# Altium PCB TutorialBoard.PcbDoc
Units mil, origin at the board's own origin, x right, y up, seen from the top; angles counter-clockwise.
Board outline 1717.45 x 1771.6 mil, 2 copper layers (Top Layer, Bottom Layer); 17 components, 13 nets, 50 pads, 4 vias.
Unrouted connection lines stored in the file: 2.
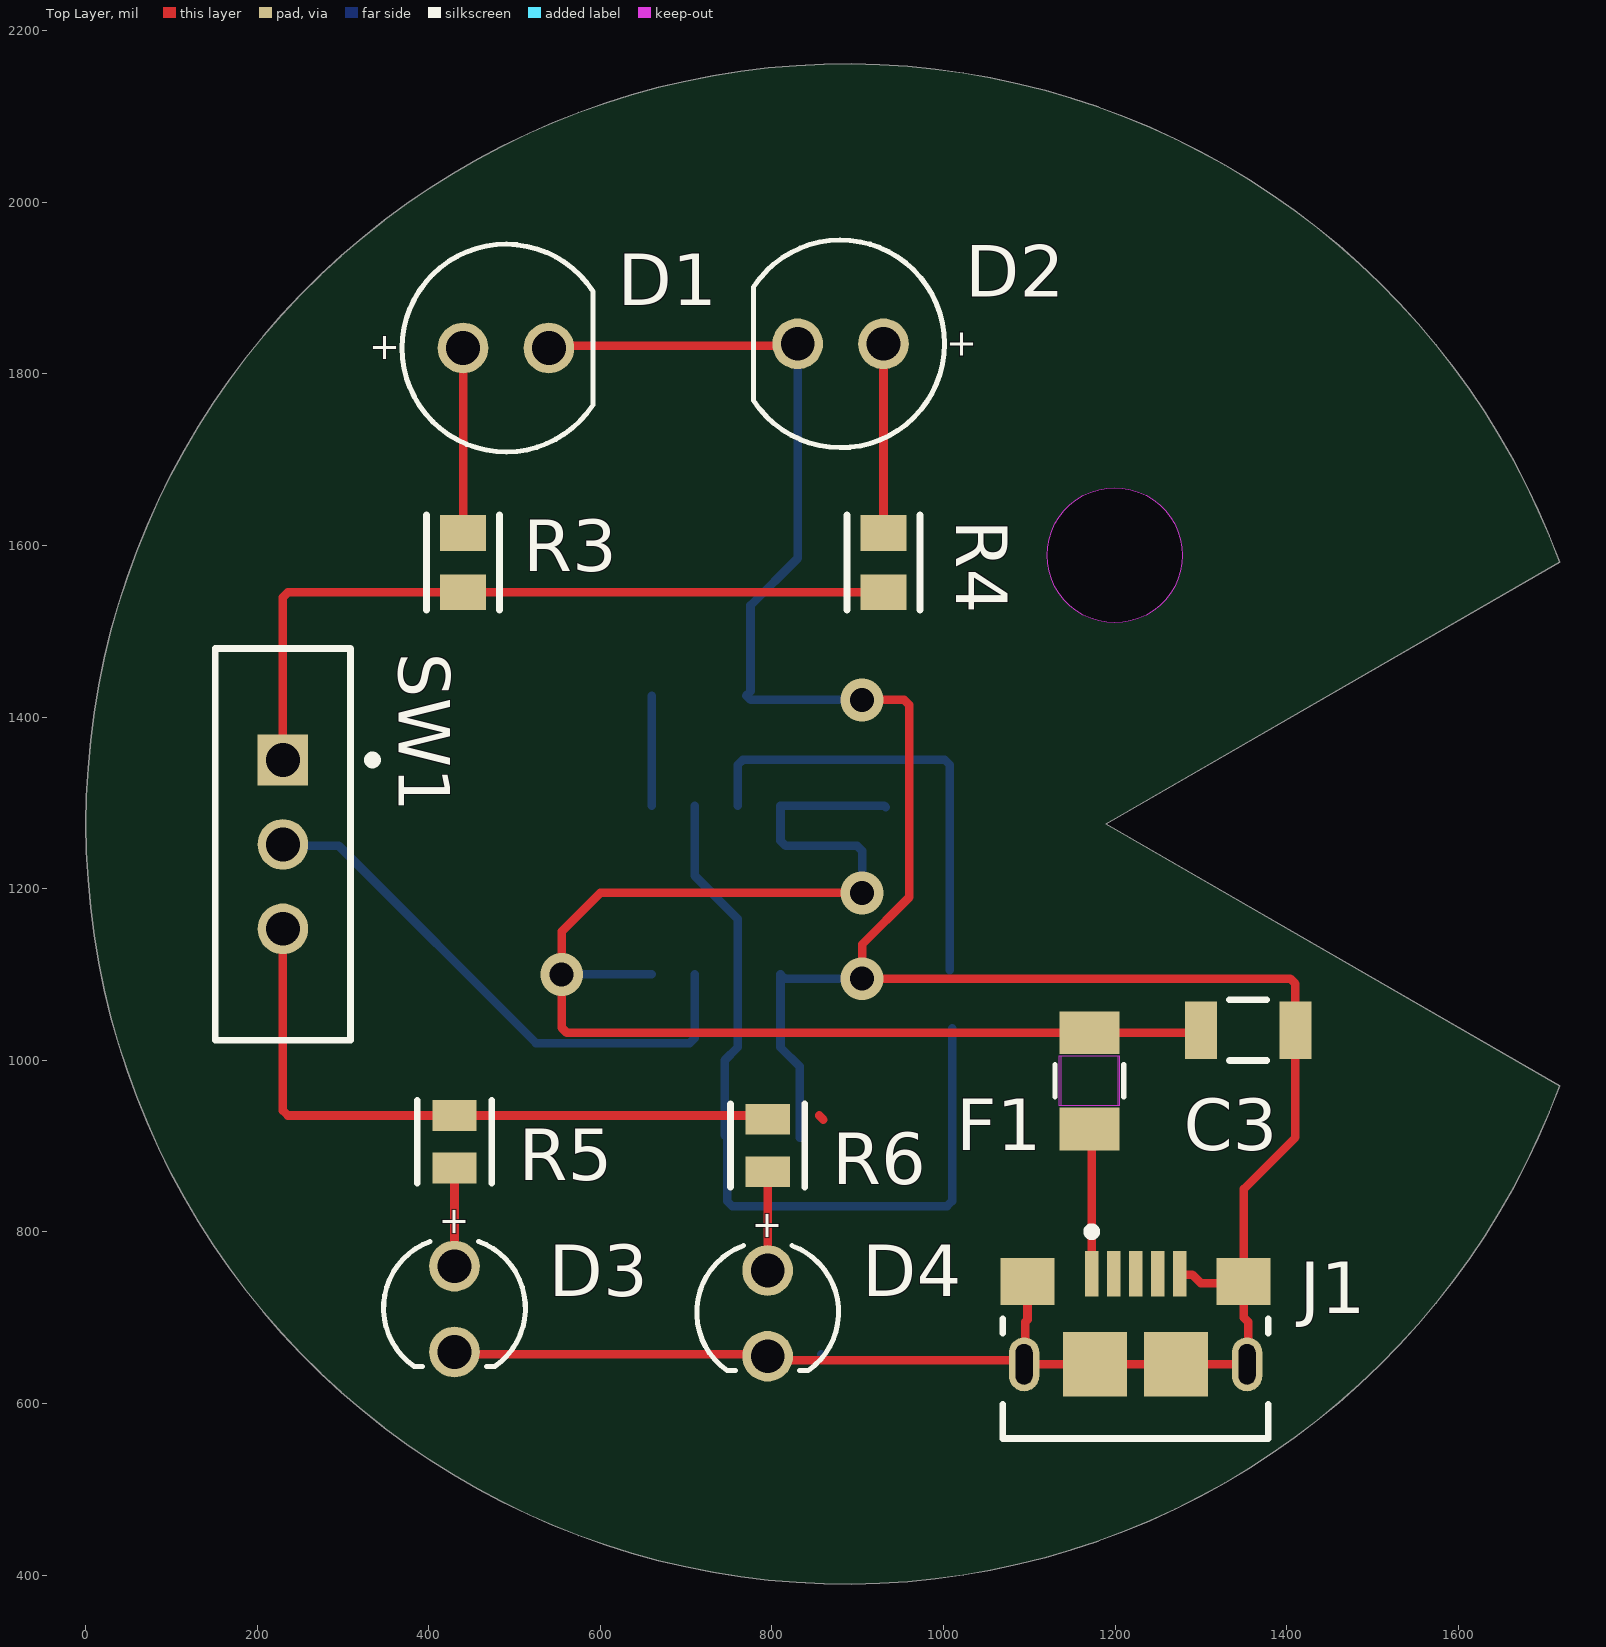
[diagram p0: Top Layer view]
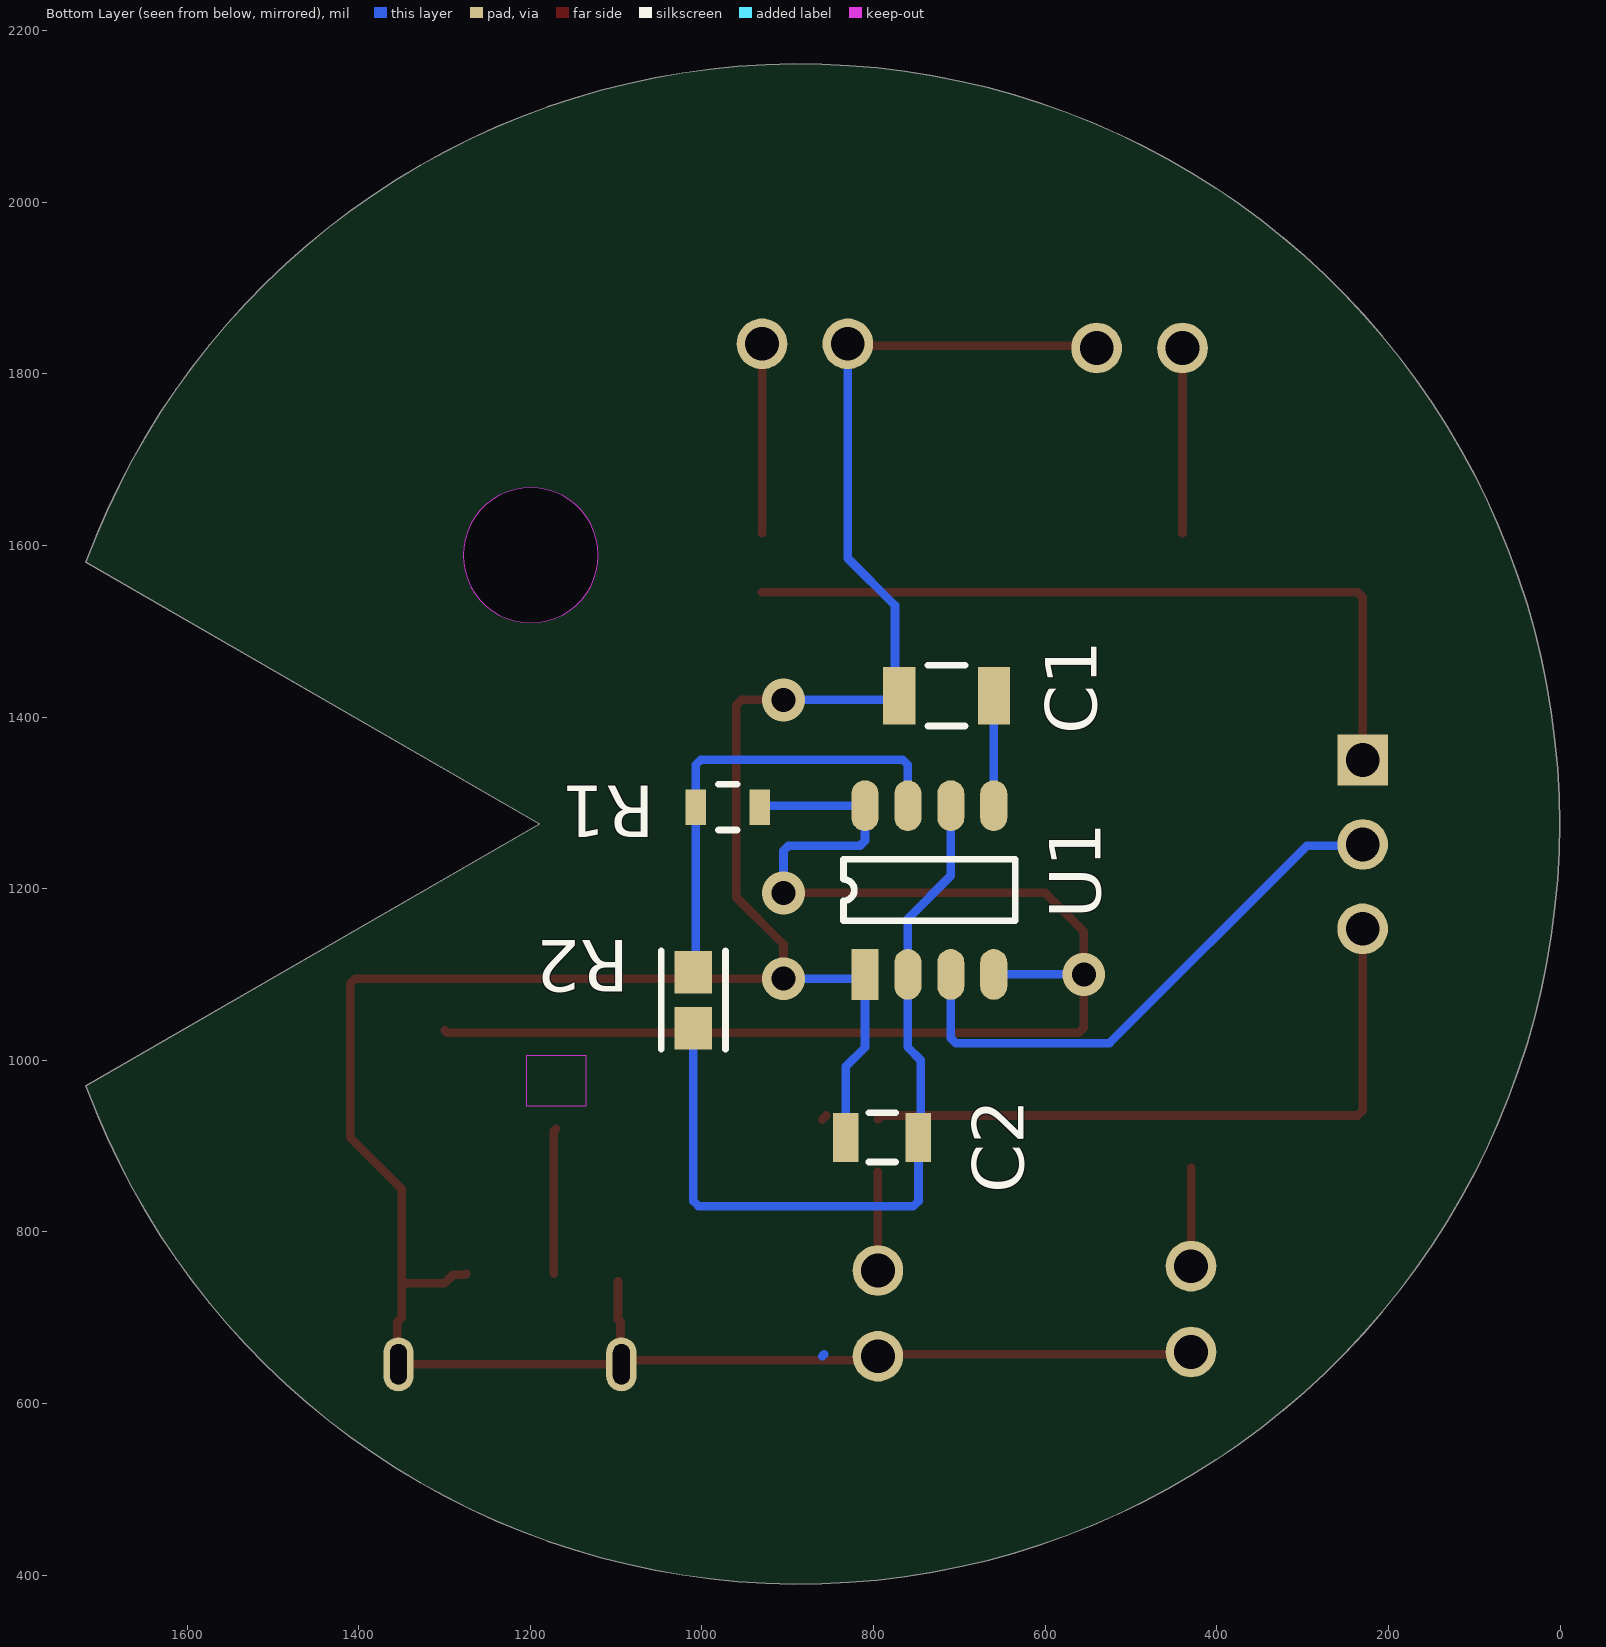
[diagram p1: Bottom Layer view, seen from below]

## Layer stack, top to bottom
Top Solder: solder mask 0.4, Solder Resist, Dk 3.5
Top Layer: signal copper 1.4
Dielectric 1: dielectric 12.6, FR-4, Dk 4.8
Bottom Layer: signal copper 1.4
Bottom Solder: solder mask 0.4, Solder Resist, Dk 3.5

## Board outline
1717.95,970.21 cw(c886.33,1275.33) 1717.95,1580.45 1189.47,1275.33
cut-out: 1199.51,1509.78 cw(c1199.51,1588.52) 1120.77,1588.52 cw(c1199.51,1588.52) 1199.51,1667.26 cw(c1199.51,1588.52) 1278.25,1588.52 cw(c1199.51,1588.52)

## Design rules (kind name [scope] priority, off if disabled: settings)
Clearance [All] p1: gap=10 ignorepadtopadclearanceinfootprint=FALSE
PolygonConnect [All] p1: connectstyle=Relief reliefconductorwidth=10 reliefentries=4 polygonreliefangle="90 Angle" airgapwidth=10
RoutingVias [All] p1: holewidth=28 width=50 viastyle="Through Hole" minholewidth=28 minwidth=50 maxholewidth=28 maxwidth=50
SolderMaskExpansion [All] p1: expansion=0 istentingtop=FALSE
SupplyNets "Schematic Supply Nets_1" [InNet('+5')] p1: voltage=0.000
SupplyNets "Schematic Supply Nets" [InNet('GND')] p2: voltage=0.000
Width [All] p1: maxlimit=10 minlimit=10 preferedwidth=10
30 further rules are at their usual default settings.

## Classes and differential pairs
component class Power: C3 J1
component class 555_timer: C1 C2 D1 D2 D3 D4 R1 R2 R3 R4 R5 R6 SW1 U1

## Components (designator, comment, footprint, x,y, rotation, side; value= is the part's Value field where it differs from the comment)
C1 "C1206C103K5RAC7210" FP-C1206C-EB-MFG 715,1425 r0 bottom value="10,000 pF"
C2 "CGA4J3X7S1A685K125AB" FP-CGA4J-IPC_B 790,910 r0 bottom
C3 "C1206C103K5RAC7210" FP-C1206C-EB-MFG 1355,1035 r0 top value="10,000 pF"
D1 "151051BS04000" WL-TMRC_D5.9H8.7 490,1830 r0 top
D2 "151051BS04000" WL-TMRC_D5.9H8.7 880,1835 r180 top
D3 "151031VS06000" WL-TMRC_D3.95H5.3 50430,-49290 r270 top
D4 "151031VS06000" WL-TMRC_D3.95H5.3 50795,-49295 r270 top
F1 "C1F 250" C1_BEL 1170,976 r90 top
J1 "10118193-0001LF" FCI-10118193-0001LF-5_V 1223.82,698.8 r0 top
R1 "RK73H2ATTE1001F" FP-RK73H2A-MFG 970,1295 r180 bottom
R2 "RR0816P-104-D" FP-RR0816-IPC_A 1010,1070 r90 bottom
R3 "CR0805-JW-101ELF" FP-CR0805-IPC_B 440,1580 r90 top
R4 "CR0805-JW-101ELF" FP-CR0805-IPC_B 930,1580 r90 top
R5 "CRGCQ0805F120R" FP-CRGCQ0805-IPC_C 430,905 r270 top value=120Ω
R6 "CRGCQ0805F120R" FP-CRGCQ0805-IPC_C 795,900.55 r270 top value=120Ω
SW1 "EG1218" ESWI-EG1218_V 230,1251.57 r270 top
U1 "NE555S-13" NE555S-13 810,1100 r90 bottom

## Footprints (in the part's own frame and the unit in brackets; to place one, negate y for a bottom-side part, rotate by r counter-clockwise, add the part's x,y. Pads: shape width x height; smd on the part's side, far side on the other; paste and mask are expansions set on the pad)
C1_BEL [mil]
  rect 50x70 smd paste+0 mask+0: 1(-56,0) 2(56,0)
  Top Layer keep-out region: -29,-33 -29,33 29,33 29,-33
  Keep-Out Layer region: -29,-35 -29,35 29,35 29,-35
  silkscreen extent -19,-40 19,40, body extent -67,-35 67,35, height 31
ESWI-EG1218_V [mm] "THD, 3-Leads, Body 11.6x4mm, Pitch 2.5mm"
  rect 1.5x1.5 hole 1: 1(-2.5,0)
  round 1.5 hole 1: 2(0,0) 3(2.5,0)
  silkscreen extent -5.8,-2 5.8,2.78, body extent -5.8,-2 5.8,2, height 7.4
FCI-10118193-0001LF-5_V [mm] "Micro, USB-B, 5-Leads, Body 7.86x5.05mm, Pitch 0.65 mm"
  rect 0.4x1.35 smd: 1(-1.3,1.325) 2(-0.65,1.325) 3(0,1.325) 4(0.65,1.325) 5(1.3,1.325)
  rect 1.6x1.4 smd: 6(-3.2,1.1) 7(3.2,1.1)
  rect 1.9x1.9 smd: 8(-1.2,-1.35) 9(1.2,-1.35)
  oval 0.9x1.6 hole 0.5 slot 1.2 at 90 deg: 10(-3.3,-1.35) 11(3.3,-1.35)
  silkscreen extent -3.93,-3.55 3.93,2.7, body extent -3.93,-4.16 3.93,1.5, height 2.83
FP-C1206C-EB-MFG [mm]
  rect 0.95x1.7 smd paste+0 mask+0: 1(-1.4,0) 2(1.4,0)
  silkscreen extent -0.55,-0.9 0.55,0.9, body extent -1.6,-0.8 1.6,0.8, height 0.88
FP-CGA4J-IPC_B [mm]
  rect 0.756x1.456 smd paste+0 mask+0: 1(-1.075,0) 2(1.075,0)
  silkscreen extent -0.4,-0.73 0.4,0.73, body extent -1,-0.63 1,0.63, height 1.45
FP-CR0805-IPC_B [mil]
  rect 41.66x53.63 smd paste+0 mask+0: 1(-34.53,0) 2(34.53,0)
  silkscreen extent -55,-43 55,43, body extent -65,-37 65,37, height 10
FP-CRGCQ0805-IPC_C [mil]
  rect 35.67x51.57 smd paste+0 mask+0: 1(-30.55,0) 2(30.55,0)
  silkscreen extent -48,-43 48,43, body extent -52,-31 52,31, height 10
FP-RK73H2A-MFG [mm]
  rect 0.6x1.05 smd paste+0 mask+0: 1(-0.95,0) 2(0.95,0)
  silkscreen extent -0.28,-0.67 0.28,0.67, body extent -1,-0.63 1,0.63, height 0.6
FP-RR0816-IPC_A [mil]
  rect 49.41x43.55 smd paste+0 mask+0: 1(-32.51,0) 2(32.51,0)
  silkscreen extent -57,-38 57,38, body extent -31,-16 31,16, height 20
NE555S-13 [mm] "555 Timer"
  rect 1.505x0.802 smd: 1(0,0)
  oval 1.505x0.802 smd: 2(0,-1.27) 3(0,-2.54) 4(0,-3.81) 5(4.995,-3.81) 6(4.995,-2.54) 7(4.995,-1.27) 8(4.995,0)
  silkscreen extent 1.59,-4.44 3.41,0.63
WL-TMRC_D3.95H5.3 [mm] "THT Mono-color Round Color LED, 2-leads"
  round 1.5 hole 1: 1(-1271.27,-1270) 2(-1268.73,-1270)
  silkscreen extent -1272,-1272.1 -1268.31,-1267.9, body extent -1271.99,-1271.97 -1268.37,-1268.03, height 5.35
WL-TMRC_D5.9H8.7 [mm] "THT Mono-color Round Color LED, 2-leads"
  round 1.5 hole 1: 1(-1.27,0) 2(1.27,0)
  silkscreen extent -3.07,-3.07 2.58,3.08, body extent -2.95,-2.95 2.45,2.95, height 9.2

## Part data
C1 C3: library part CMP-03020-021901-1, "CAP CER 10000PF 50V X7R 1206", Capacitance="10,000 pF", Manufacturer=KEMET, Package=C1206C-EB, Temperature="-55°C to +150°C", Temperature Characteristic=X7R, Temperature Coefficient=15%, Temperature Range High=+150°C, Temperature Range Low=-55°C, Tolerance=0.1, Voltage Rating="50 V", Automotive=Yes, Automotive Grade="Grade 0", Category=Cap, ComponentLink2Description=Datasheet, ComponentLink2URL=https://content.kemet.com/datasheets/KEM_C1007_X8R_ULTRA_150C_SMD.pdf, Device Class L1="Passive Components", Device Class L2=Capacitors, Device Class L3="Ceramic Capacitors", Digikey Description="CAP CER 10000PF 50V X7R 1206", Height=0.88mm, Ipc Land Pattern Name=CAPC320160X78, Lead Free=Yes, Manufacturer Part Number=C1206C103K5RAC7210, Material=Ceramic, Mouser Description="Multilayer Ceramic Capacitors MLCC - SMD/SMT 50volts 10000pF X7R 10%", Octopart=https://octopart.com/c1206c103k5rac7210-kemet-3918401, RoHS=TRUE
C2: library part CMP-08246-001055-1, "Cap Ceramic 6.8uF 10V X7S 10% Pad SMD 0805 +125°C Automotive T/R", Capacitance=6.8uF, Case Code (Imperial)=0805, Case Code (Metric)=2012, Dielectric=X7S, Max Operating Temperature=125°C, Min Operating Temperature=-55°C, Package Quantity=2000, Tolerance=10%, Voltage Rating (DC)=10V, Case/Package=0805, Height=1.25mm, Length=2mm, Packaging="Tape and Reel", Termination=SMD/SMT, Weight=0.000194oz, Width=1.25mm
D1 D2: library part CMP-1488-00009-3, "Single Color LED, Blue, Diffused, T-1 3/4, 4.9mm", Case/Package=Radial, Color=Blue, Forward Current=100mA, Forward Voltage=3.2V, Manufacturer Lifecycle Status=ACTIVE, Max Operating Temperature=85°C, Max Reverse Voltage (DC)=5V, Min Operating Temperature=-40°C, Test Current=20mA, Dominant Wavelength=470nm, Height=8.6mm, Length=5mm, Lens Size=5mm, Lens Style="Circular, Diffused, Round", Lifecycle Status=Production, Luminous Intensity=500mcd, Mount="Through Hole", Packaging=Bulk, Peak Wavelength=465nm, REACH SVHC=Unknown, RoHS=Compliant, Viewing Angle=40°, Wavelength=470nm, Width=5mm, YEOL="1 = Estimated lifetime > 10 years"
D3 D4: library part CMP-1488-00004-3, "Led, Green, T-1 (3Mm), 568 Nm, 2.2 V, 30 Ma, 20 Mcd Rohs Compliant: Yes", Case/Package=Radial, Color=Green, Forward Current=100mA, Forward Voltage=2.2V, Manufacturer Lifecycle Status=ACTIVE, Max Operating Temperature=85°C, Max Reverse Voltage (DC)=5V, Min Operating Temperature=-40°C, Test Current=20mA, Dominant Wavelength=568nm, Height=5.3mm, Lead Free="Lead Free", Length=3mm, Lens Size=3mm, Lens Style="Circular, Diffused, Round", Lifecycle Status=Production, Luminous Intensity=30mcd, Mount="Through Hole", Packaging=Bulk, Peak Wavelength=560nm, REACH SVHC=Unknown, RoHS=Compliant, Viewing Angle=60°, Wavelength=568nm, Width=3mm, YEOL="1 = Estimated lifetime > 10 years"
F1: "Description", Manufacturer_Name=Belfuse, Copyright="Copyright (C) 2026 Ultra Librarian. All rights reserved.", Manufacturer_Part_Number="C1F 250"
J1: library part CMP-2000-05119-1, "Micro USB B Type Receptacle, -55 to 85 degC, 5-Pin SMD, RoHS, Tape and Reel", Color=Black, Current Rating=1.8A, Flammability Rating=UL94V-0, Insulation Resistance=1000MOhms, Manufacturer=FCI, Operating Temperature Range=-55Cto+85C, Brand=FCI, Connector Type=MicroUSBTypeBreceptacle, Contact Material=CopperAlloy, Contact Plating=Gold, Datasheet URL=http://datasheet.octopart.com/10118193-0001LF-FCI-datasheet-55953155.pdf, Datasheet Version="Rev. C, 05/2015", Factory Pack Quantity=1200, Gender=Female, Manufacturer URL=http://www.fci.com/, Mounting Angle=Right, Number of Contacts=5Contact, Packaging=Reel, Product=MicroUSBTypeBConnectors, Product Category=USBConnectors, RoHS=Details, Standard=USB2.0, Termination Style=SMD/SMT
R1: library part CMP-2001-01881-2, "1kΩ ±1% 0.25W Chip Resistor 0805 Thick Film AEC-Q200 Qualified", Case Code (Imperial)=0805, Case Code (Metric)=2012, Manufacturer Series=RK73H, Max Operating Temperature=155°C, Min Operating Temperature=-55°C, Package Quantity=4000, Package Shape=Rectangular, Power Rating=125mW, Resistance=1kΩ, Resistor Type="Thick Film", Temperature Coefficient=100ppm/°C, Tolerance=1%, Voltage Rating=150V, Additional Feature=PRECISION, Case/Package=0805, Construction=Rectangular, Depth=1.25mm, Height=0.5mm, Lead Free="Lead Free", Length=2mm, Military Standard=Not, Packaging="Tape and Reel", RoHS Compliant=Yes, Series=RK73H, Size Code=0805, Technology="METAL GLAZE/THICK FILM", Terminal Finish=Tin, Termination=SMD/SMT, Width=1.25mm, Working Voltage=150V
R2: library part CMP-2000-02426-2, "100kΩ ±0.5% 0.0625W 1/16W Chip Resistor 0603 (1608 Metric) Thin Film", Case Code (Imperial)=0603, Case Code (Metric)=1608, Max Operating Temperature=125°C, Max Power Dissipation=63mW, Min Operating Temperature=-55°C, Package Quantity=1, Resistance=100kΩ, Resistance Tolerance=0.5%, Resistor Type="Thin Film", Temperature Coefficient=25ppm/°C, Voltage Rating=75V, Case/Package=0603, Depth=0.8mm, Height=0.4mm, Lead Free="Lead Free", Length=1.6mm, Number of Pins=2, Number of Terminations=2, Packaging="Tape and Reel", Power Rating=63mW, RoHS Compliant=Yes, Series=RR, Technology="THIN FILM", Termination=SMD/SMT, Tolerance=0.5%, Voltage Rating (DC)=75V, Width=0.8mm, Working Voltage=75V
R3 R4: library part CMP-07231-002659-1, "Thick Film Chip Resistors 0805 100Ω 0.125W 5% 200ppm/°C", Case Code (Imperial)=0805, Case Code (Metric)=2012, Max Operating Temperature=155°C, Max Power Dissipation=125mW, Min Operating Temperature=-55°C, Package Quantity=1, Resistance=100Ω, Temperature Coefficient=200ppm/°C, Tolerance=5%, Voltage Rating=150V, Case/Package=0805, Composition="Thick Film", Contact Plating=Tin, Depth=1.25mm, Features="Moisture Resistant", Height=0.024inch, Length=2mm, Military Standard=Not, Mount="Surface Mount", Number of Terminations=2, Packaging="Tape and Reel", Power Rating=125mW, REACH SVHC="No SVHC", Termination=SMD/SMT, Thickness=508um, Voltage Rating (DC)=150V, Width=1.25mm
R5 R6: library part CMP-03211-008258-1, "CRGCQ 0805 120R 1%", Ambient Temperature Range High=+70°C, Manufacturer="TE Connectivity", Package=CRGCQ0805, Power Rating=0.125W, Resistance=120Ω, Temperature="-55°C to +155°C", Temperature Coefficient=±100ppm/°C, Temperature Range High=+155°C, Temperature Range Low=-55°C, Tolerance=0.01, Voltage Rating=150V, Automotive=Yes, Automotive Grade="Grade 473", Category=Res, ComponentLink2Description=Datasheet, ComponentLink2URL=https://www.te.com/commerce/DocumentDelivery/DDEController?Action=showdoc&DocId=Data+Sheet%7F1773204-3%7F1%7Fpdf%7FEnglish%7FENG_DS_1773204-3_1.pdf%7F4-2176341-482, Composition="Thick Film", Device Class L1="Passive Components", Device Class L2=Resistors, Device Class L3="Chip SMD Resistors", Digikey Description="CRGCQ 0805 120R 1%", Height=0.65mm, Ipc Land Pattern Name=RESC200125X55, Lead Free=Yes, Manufacturer Part Number=CRGCQ0805F120R, Octopart=https://octopart.com/crgcq0805f120r-te+connectivity-91018143, RoHS=TRUE, Series=CRGCQ
SW1: library part CMP-1696-00002-1, "Slide Switch, 500 V, -20 to 70 degC, 3-Pin THD, RoHS", Case\Package=SOT-23-5, Dropout Voltage="300 mV", Max Input Voltage="8 V", Max Operating Temperature="85 degC", Max Ouput Current="150 mA", Max Power Dissipation="250 mW", Min Input Voltage="4.3 V", Min Operating Temperature="-40 degC", Nominal Output Voltage="3.3 V", Package Quantity=3000, ComponentLink1Description="Manufacturer URL", ComponentLink1URL=http://www.e-switch.ch/en/, ComponentLink2Description=Datasheet, ComponentLink2URL=https://www.e-switch.com/system/asset/product_line/data_sheet/119/EG.pdf, DatasheetVersion=Oct-15, Height="1.3 mm", Length="3 mm", Mount="Surface Mount", Output Current="150 mA", Output Voltage="3.3 V", Outputs=1, PackageDescription="3-Pin Through Hole Device, Body 11.6 x 4 mm, Pitch 2.5 mm", PackageReference=EG1218, Packaging="Tape and Reel", Pins=5, Power Rating="250 mW", Radiation Hardening=No, REACH SVHC="No SVHC", RoHSCompliant=true, Width="1.8 mm"
U1: "IC OSC SNGL TIMER 500KHZ 8-SOIC", Supplier 1=Newark, Supplier Part Number 1=NE555S-13

## Via types
v1: diameter 50, hole 28, Top Layer to Bottom Layer, 4 vias

## Nets (pads, with @x,y where several pads share a name; then routed paths per layer and width w, separated by ;. In a path a pad name is that pad's centre, name@x,y a point inside that pad or via, vN(x,y) a via of type N, cw(c..) or ccw(c..) an arc to the next point about the centre after c; other vN are vias at no path point)
+5: C3.1 F1.2 R1.2 U1.4 U1.8 | length 1654.5
  Top Layer w10: v1@900,1200 v1(905,1195) 600,1195 555,1150 v1(555,1100) 555,1037.86 560.86,1032 F1.2 1296.88,1032 C3.1
  Bottom Layer w10: v1(555,1100) U1.4 ; v1(905,1195) 905,1244.14 899.14,1250 815.86,1250 810,1255.86 U1.8 930.94,1296.65 R1.2
GND: C1.2 C2.2 C3.2 D1.2 D2.2 D3.2 D4.2 J1.5 J1.6 J1.7 J1.8 J1.9 J1.10 J1.11 U1.1 | length 3653.2
  Top Layer w10: D3.2 432.5,657.5 792.5,657.5 D4.2 799.68,650.32 1089.22,650.32 J1.10 ; D1.2 542.5,1832.5 827.5,1832.5 D2.2 ; v1(905,1420) 954.14,1420 960,1414.14 960,1190 905,1135 v1(905,1095) 1404.26,1095 1410.12,1089.14 C3.2 1410.12,910.12 1350,850 1350,742.3 J1.7 ; J1.6 1097.83,697.83 1095,695 1095,646.75 J1.10 ; J1.5 1275.96,750 1290,750 1300,740 1347.7,740 J1.7 ; J1.10 J1.8 J1.9 J1.11 1355,646.91 1355,695 1349.8,700.2 J1.7
  Bottom Layer w10: D3.2 D3.2@432.5,657.5 ; D2.2 829.99,1584.99 775,1530 775,1429.88 C1.2 775.12,1420 v1(905,1420) ; C2.2 832.32,992.68 810,1015 U1.1 815,1095 v1(905,1095) ; 857.5,657.5 860,655
NetC1_1: C1.1 U1.5 | length 128.4
  Bottom Layer w10: C1.1 660,1424.88 U1.5
NetD1_1: D1.1 R3.2 | length 215.5
  Top Layer w10: R3.2 D1.1
NetD2_1: D2.1 R4.2 | length 220.5
  Top Layer w10: R4.2 D2.1
NetD3_1: D3.1 R5.2 | length 114.4
  Top Layer w10: D3.1 R5.2
NetD4_1: D4.1 R6.2 | length 115
  Top Layer w10: D4.1 R6.2
NetF1_1: F1.1 J1.1 | length 170.1
  Top Layer w10: F1.1 1172.64,917.36 J1.1
NetR1_1: R1.1 R2.2 U1.7 | length 538.8
  Bottom Layer w10: U1.7 760,1344.14 765.86,1350 1001.54,1350 1007.4,1344.14 R1.1 R2.2@1007.4,1105.1
NetR3_1: R3.1 R4.1 SW1.1 | length 892
  Top Layer w10: SW1.1 230,1539.61 235.86,1545.47 R3.1 R4.1
NetR5_1: R5.1 R6.1 SW1.3 | length 788.1
  Top Layer w10: SW1.3 230,941.41 235.86,935.55 R5.1 790.55,935.55 R6.1 ; 855,935.55 860,930.55
OUTPUT: SW1.2 U1.3 | length 652.5
  Bottom Layer w10: SW1.2 231.57,1250 295,1250 525,1020 704.14,1020 710,1025.86 U1.3
TRIG: C2.1 R2.1 U1.2 U1.6 | length 957.6
  Bottom Layer w10: U1.6 710,1215 760,1165 U1.2 760,1015 745,1000 745,912.68 C2.1 747.68,835.86 753.54,830 1004.14,830 1010,835.86 R2.1
pads on no net: J1.2 J1.3 J1.4

## Silkscreen, mask and mechanical layers (free items; w line width, h text height)
Board Shape:
  circle w0.25: c881.33,1315.33 r0.12
  circle w0.5: c1199.51,1588.52 r78.74
  lines w0.5: 1189.47,1275.33 1717.95,970.21 cw(c886.33,1275.33) 1717.95,1580.45 1189.47,1275.33

## Text inside footprints (layer, text, board x,y; h text height)
D1: Top Overlay "+" at 330.55,1817.01 h31.5
D2: Top Overlay "+" at 1039.45,1847.99 h31.5 r180
D3: Top Overlay "+" at 416.22,830.08 h31.5 r270
D4: Top Overlay "+" at 781.22,825.08 h31.5 r270